# EAGLE board CPC_BACKPLANE (EAGLE 6.4)
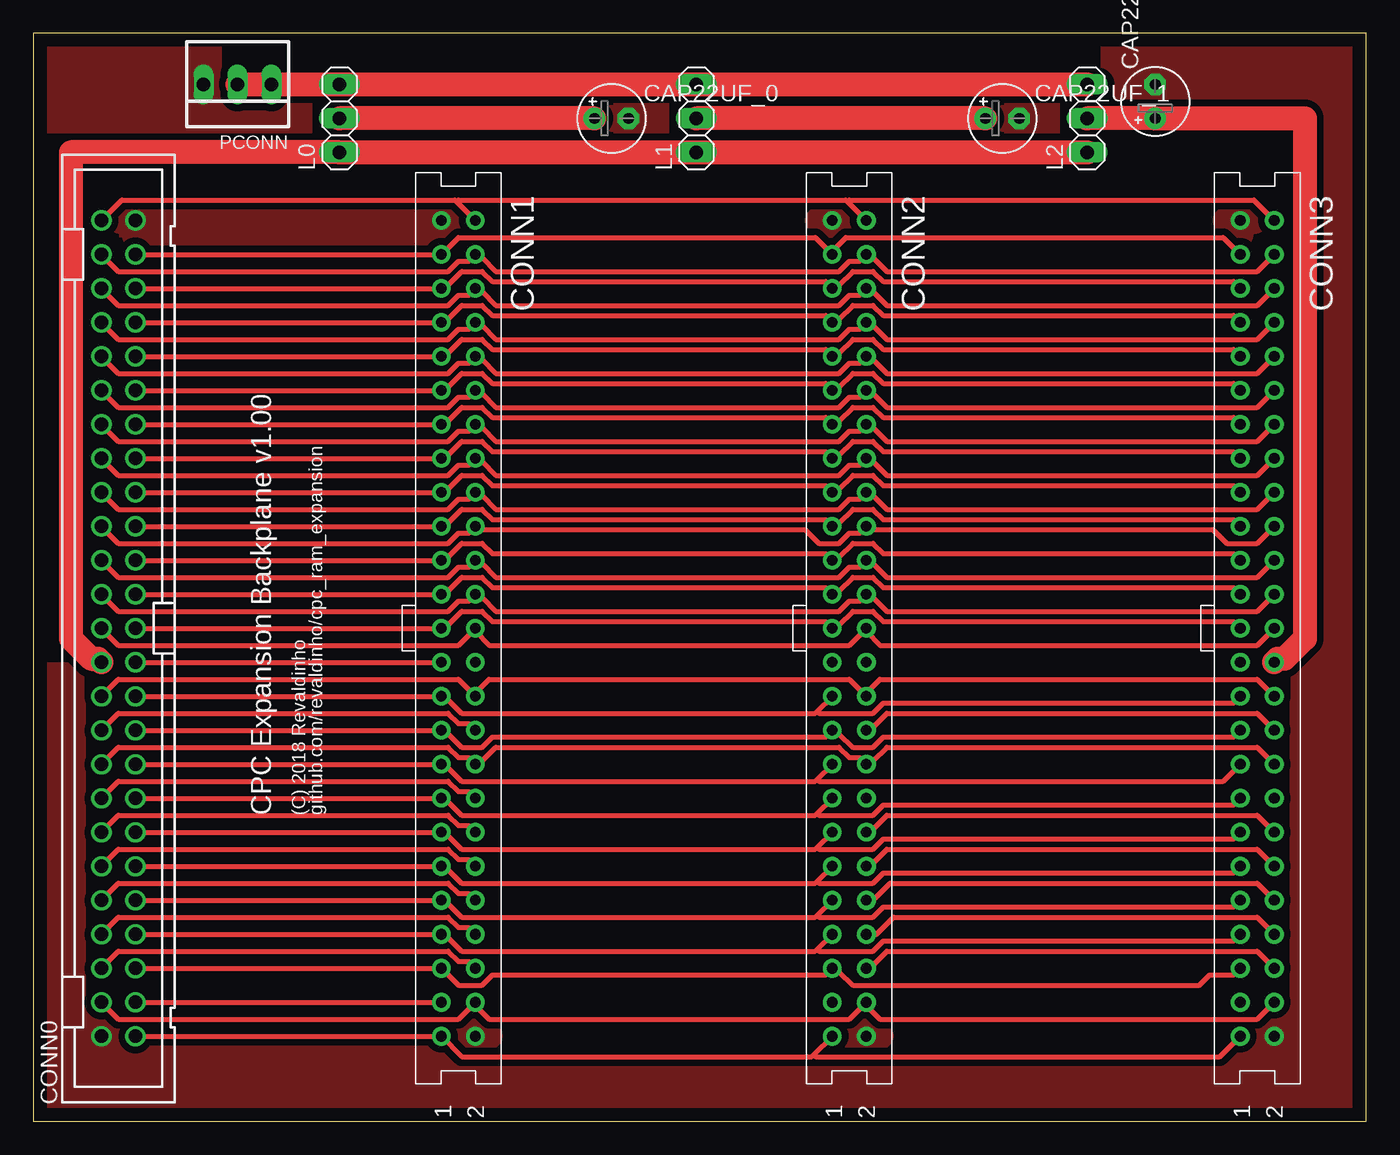
[diagram p0: board, top side]
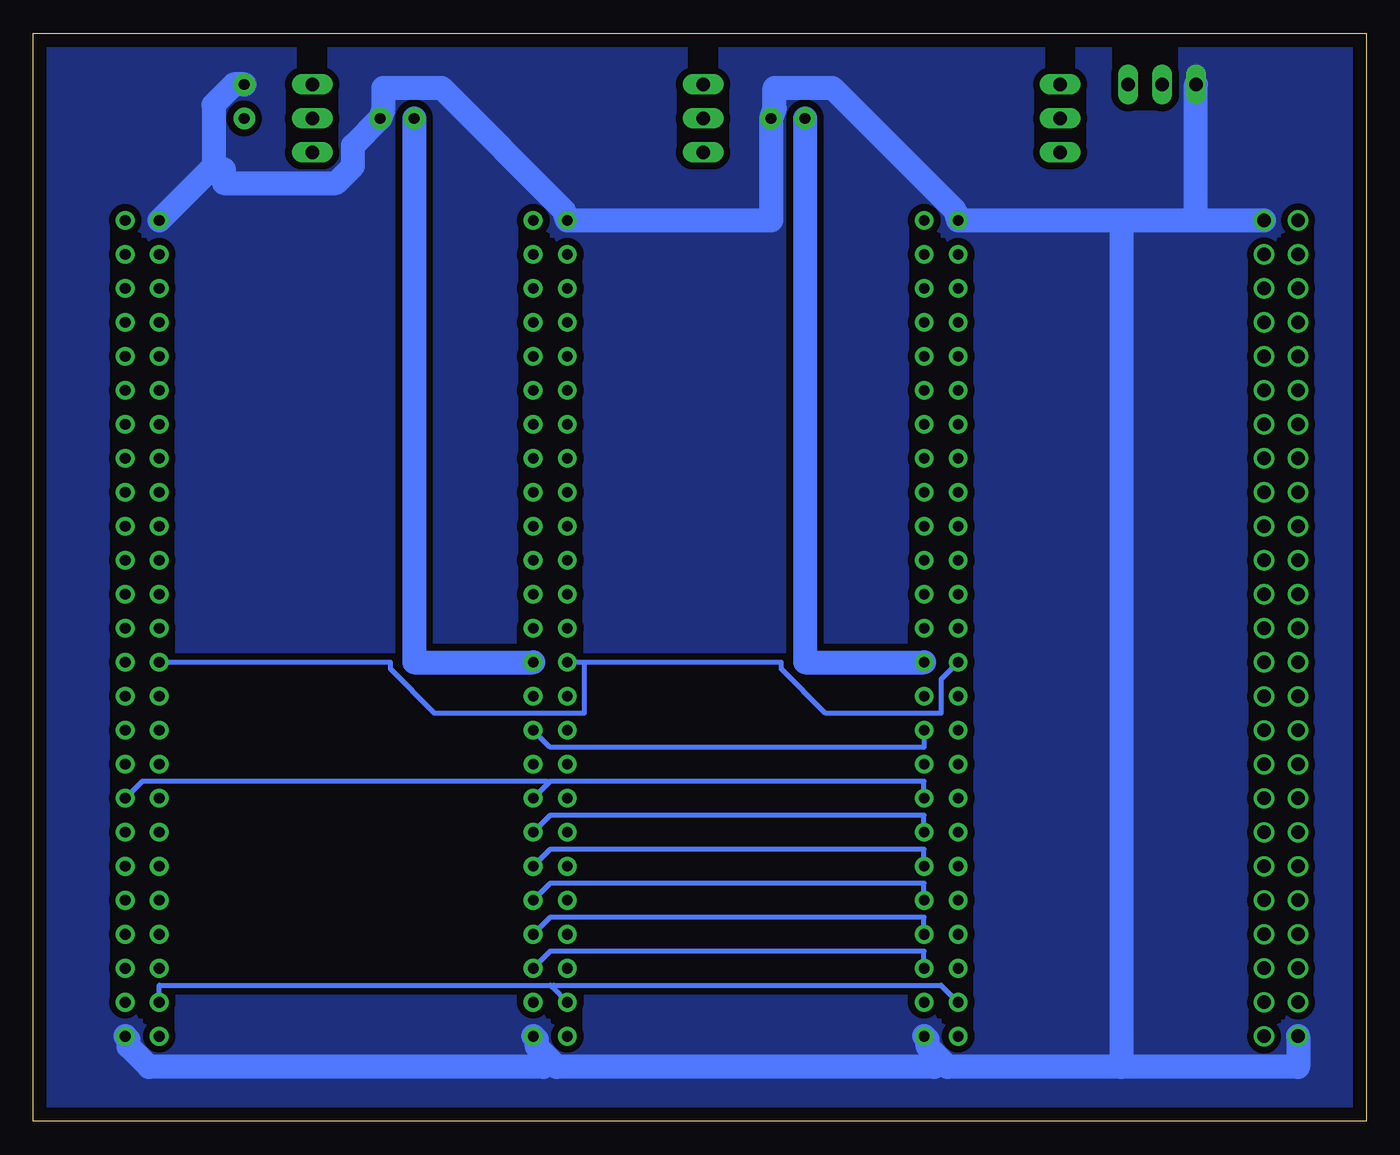
[diagram p1: board, bottom side, seen from below]

Size 99.57 x 81.28 mm. Coordinates in mm from the lower left corner, seen from the top.
Outline: 0,0 99.57,0 99.57,81.28 0,81.28 0,0
Copper layers (1*16): Top 0.035mm / dielectric 1.5mm / Bottom 0.035mm
Design rules "default": minimum track width 10mil, minimum drill 24mil, track to track 8mil, track to pad 8mil, pad to pad 8mil, via to via 8mil, smd to smd 8mil, copper to edge 40mil, drill to drill 8mil, minimum pad ring 10mil, minimum via ring 8mil, stop-mask expansion 4mil, vias tented up to drill 0mil, thermal gap 10mil
Net classes: 0 signal: width 0.381 mm, clearance 0.254 mm; 1 supply: width 1.778 mm, clearance 0.508 mm

## Footprints (pad centres in the part's own frame; a part is rotated, then mirrored left to right if it is on the bottom)
E2,5-5 = drill 0.813 pad 1.6: + -1.27,0 | drill 0.813 pad 1.6 octagon: - 1.27,0
PAK100/2500-50 = drill 1 pad 1.422: 1 -30.48,-1.27; 2 -30.48,1.27; 3 -27.94,-1.27; 4 -27.94,1.27; 5 -25.4,-1.27; 6 -25.4,1.27; 7 -22.86,-1.27; 8 -22.86,1.27; 9 -20.32,-1.27; 10 -20.32,1.27; 11 -17.78,-1.27; 12 -17.78,1.27; 13 -15.24,-1.27; 14 -15.24,1.27; 15 -12.7,-1.27; 16 -12.7,1.27; 17 -10.16,-1.27; 18 -10.16,1.27; 19 -7.62,-1.27; 20 -7.62,1.27; 21 -5.08,-1.27; 22 -5.08,1.27; 23 -2.54,-1.27; 24 -2.54,1.27; 25 0,-1.27; 26 0,1.27; 27 2.54,-1.27; 28 2.54,1.27; 29 5.08,-1.27; 30 5.08,1.27; 31 7.62,-1.27; 32 7.62,1.27; 33 10.16,-1.27; 34 10.16,1.27; 35 12.7,-1.27; 36 12.7,1.27; 37 15.24,-1.27; 38 15.24,1.27; 39 17.78,-1.27; 40 17.78,1.27; 41 20.32,-1.27; 42 20.32,1.27; 43 22.86,-1.27; 44 22.86,1.27; 45 25.4,-1.27; 46 25.4,1.27; 47 27.94,-1.27; 48 27.94,1.27; 49 30.48,-1.27; 50 30.48,1.27
S50V = drill 0.8 pad 1.4: 1 30.48,-1.27; 2 30.48,1.27; 3 27.94,-1.27; 4 27.94,1.27; 5 25.4,-1.27; 6 25.4,1.27; 7 22.86,-1.27; 8 22.86,1.27; 9 20.32,-1.27; 10 20.32,1.27; 11 17.78,-1.27; 12 17.78,1.27; 13 15.24,-1.27; 14 15.24,1.27; 15 12.7,-1.27; 16 12.7,1.27; 17 10.16,-1.27; 18 10.16,1.27; 19 7.62,-1.27; 20 7.62,1.27; 21 5.08,-1.27; 22 5.08,1.27; 23 2.54,-1.27; 24 2.54,1.27; 25 0,-1.27; 26 0,1.27; 27 -2.54,-1.27; 28 -2.54,1.27; 29 -5.08,-1.27; 30 -5.08,1.27; 31 -7.62,-1.27; 32 -7.62,1.27; 33 -10.16,-1.27; 34 -10.16,1.27; 35 -12.7,-1.27; 36 -12.7,1.27; 37 -15.24,-1.27; 38 -15.24,1.27; 39 -17.78,-1.27; 40 -17.78,1.27; 41 -20.32,-1.27; 42 -20.32,1.27; 43 -22.86,-1.27; 44 -22.86,1.27; 45 -25.4,-1.27; 46 -25.4,1.27; 47 -27.94,-1.27; 48 -27.94,1.27; 49 -30.48,-1.27; 50 -30.48,1.27
1X03 = drill 1.016 long: 1 -2.54,0; 2 0,0; 3 2.54,0
22-23-2031 = drill 1 long: 1 -2.54,0; 2 0,0; 3 2.54,0

## Placement (x,y rotation side)
CAP22UF_0  [E2,5-5]  43.18,74.93 0 top
CAP22UF_1  [E2,5-5]  72.39,74.93 0 top
CAP22UF_2  [E2,5-5]  83.82,76.2 90 top
CONN0  [PAK100/2500-50]  6.35,36.83 90 top
CONN1  [S50V]  31.75,36.83 270 top
CONN2  [S50V]  60.96,36.83 270 top
CONN3  [S50V]  91.44,36.83 270 top
L0  [1X03]  22.86,74.93 90 top
L1  [1X03]  49.53,74.93 90 top
L2  [1X03]  78.74,74.93 90 top
PCONN  [22-23-2031]  15.24,77.47 180 top

## Library data of the parts
CAP22UF_0 CAP22UF_1 CAP22UF_2 = resistor
CONN0 = con-3m
CONN1-CONN3 = con-3m-skt-header
L0 L1 L2 = pinhead
PCONN = con-molex

## Nets
A0: CONN0.33 CONN1.33 CONN2.33 CONN3.33
A1: CONN0.34 CONN1.34 CONN2.34 CONN3.34
A2: CONN0.35 CONN1.35 CONN2.35 CONN3.35
A3: CONN0.36 CONN1.36 CONN2.36 CONN3.36
A4: CONN0.37 CONN1.37 CONN2.37 CONN3.37
A5: CONN0.38 CONN1.38 CONN2.38 CONN3.38
A6: CONN0.39 CONN1.39 CONN2.39 CONN3.39
A7: CONN0.40 CONN1.40 CONN2.40 CONN3.40
A8: CONN0.41 CONN1.41 CONN2.41 CONN3.41
A9: CONN0.42 CONN1.42 CONN2.42 CONN3.42
A10: CONN0.43 CONN1.43 CONN2.43 CONN3.43
A11: CONN0.44 CONN1.44 CONN2.44 CONN3.44
A12: CONN0.45 CONN1.45 CONN2.45 CONN3.45
A13: CONN0.46 CONN1.46 CONN2.46 CONN3.46
A14: CONN0.47 CONN1.47 CONN2.47 CONN3.47
A15: CONN0.48 CONN1.48 CONN2.48 CONN3.48
BUSACK_B: CONN0.13 CONN1.13 CONN2.13 CONN3.13
BUSRESET_B: CONN0.11 CONN1.11 CONN2.11 CONN3.11
BUSRQ_B: CONN0.14 CONN1.14 CONN2.14 CONN3.14
CLK: CONN0.1 CONN1.1 CONN2.1 CONN3.1
CURSOR: CONN0.5 CONN1.5 CONN2.5 CONN3.5
D0: CONN0.25 CONN1.25 CONN2.25 CONN3.25
D1: CONN0.26 CONN1.26 CONN2.26 CONN3.26
D2: CONN0.27 CONN1.27 CONN2.27 CONN3.27
D3: CONN0.28 CONN1.28 CONN2.28 CONN3.28
D4: CONN0.29 CONN1.29 CONN2.29 CONN3.29
D5: CONN0.30 CONN1.30 CONN2.30 CONN3.30
D6: CONN0.31 CONN1.31 CONN2.31 CONN3.31
D7: CONN0.32 CONN1.32 CONN2.32 CONN3.32
EXP_B: CONN0.3 CONN1.3 CONN2.3 CONN3.3
HALT_B: CONN0.17 CONN1.17 CONN2.17 CONN3.17
INT_B: CONN0.16 CONN1.16 CONN2.16 CONN3.16
IOREQ_B: CONN0.20 CONN1.20 CONN2.20 CONN3.20
LPEN: CONN0.4 CONN1.4 CONN2.4 CONN3.4
M1_B: CONN0.22 CONN1.22 CONN2.22 CONN3.22
MREQ_B: CONN0.23 CONN1.23 CONN2.23 CONN3.23
NMI_B: CONN0.15 CONN1.15 CONN2.15 CONN3.15
RAMDIS: CONN0.6 CONN1.6 CONN2.6 CONN3.6
RAMRD_B: CONN0.7 CONN1.7 CONN2.7 CONN3.7
RD_B: CONN0.19 CONN1.19 CONN2.19 CONN3.19
READY: CONN0.12 CONN1.12 CONN2.12 CONN3.12
RESET_B: CONN0.10 CONN1.10 CONN2.10 CONN3.10
RFSH_B: CONN0.21 CONN1.21 CONN2.21 CONN3.21
ROMDIS: CONN0.8 CONN1.8 CONN2.8 CONN3.8
ROMEN_B: CONN0.9 CONN1.9 CONN2.9 CONN3.9
SOUND: CONN0.50 CONN1.50 CONN2.50 CONN3.50
VDD1 [supply]: CAP22UF_0.+ CONN1.24 L0.2
VDD2 [supply]: CAP22UF_1.+ CONN2.24 L1.2
VDD3 [supply]: CAP22UF_2.+ CONN3.24 L2.2
VDD_CPC [supply]: CONN0.24 L0.1 L1.1 L2.1
VDD_EXT [supply]: L0.3 L1.3 L2.3 PCONN.1 PCONN.2
VSS [supply]: CAP22UF_0.- CAP22UF_1.- CAP22UF_2.- CONN0.2 CONN0.49 CONN1.2 CONN1.49 CONN2.2 CONN2.49 CONN3.2 CONN3.49 PCONN.3
WR_B: CONN0.18 CONN1.18 CONN2.18 CONN3.18

## Tracks (layer width: path | path; a pad name or v marks a point on that pad's centre or on a via)
A0
  Top 0.381: CONN0.33 CONN1.33 30.73,46.99 32,48.26 33.53,48.26 34.29,47.5 59.18,47.5 CONN2.33 59.69,47.24 60.2,47.24 61.21,48.26 62.74,48.26 63.5,47.5 89.66,47.5 CONN3.33
A1
  Top 0.381: CONN0.34 6.35,45.72 30.99,45.72 31.75,46.48 32.51,46.48 CONN1.34 33.02,46.74 33.53,46.74 34.54,45.72 60.2,45.72 60.96,46.48 61.72,46.48 CONN2.34 62.23,46.74 62.74,46.74 63.75,45.72 91.44,45.72 CONN3.34
A2
  Top 0.381: CONN0.35 CONN1.35 30.73,49.53 32,50.8 33.53,50.8 34.29,50.04 59.18,50.04 CONN2.35 59.69,49.78 60.2,49.78 61.21,50.8 62.74,50.8 63.5,50.04 89.66,50.04 CONN3.35
A3
  Top 0.381: CONN0.36 6.35,48.26 30.99,48.26 31.75,49.02 32.51,49.02 CONN1.36 33.02,49.28 33.53,49.28 34.54,48.26 60.2,48.26 60.96,49.02 61.72,49.02 CONN2.36 62.23,49.28 62.74,49.28 63.75,48.26 91.44,48.26 CONN3.36
A4
  Top 0.381: CONN0.37 CONN1.37 30.73,52.07 32,53.34 33.53,53.34 34.29,52.58 59.18,52.58 CONN2.37 59.69,52.32 60.2,52.32 61.21,53.34 62.74,53.34 63.5,52.58 89.66,52.58 CONN3.37
A5
  Top 0.381: CONN0.38 6.35,50.8 30.99,50.8 31.75,51.56 32.51,51.56 CONN1.38 33.02,51.82 33.53,51.82 34.54,50.8 60.2,50.8 60.96,51.56 61.72,51.56 CONN2.38 62.23,51.82 62.74,51.82 63.75,50.8 91.44,50.8 CONN3.38
A6
  Top 0.381: CONN0.39 CONN1.39 30.73,54.61 32,55.88 33.53,55.88 34.29,55.12 59.18,55.12 CONN2.39 59.69,54.86 60.2,54.86 61.21,55.88 62.74,55.88 63.5,55.12 89.66,55.12 CONN3.39
A7
  Top 0.381: CONN0.40 6.35,53.34 30.99,53.34 31.75,54.1 32.51,54.1 CONN1.40 33.02,54.36 33.53,54.36 34.54,53.34 60.2,53.34 60.96,54.1 61.72,54.1 CONN2.40 62.23,54.36 62.74,54.36 63.75,53.34 91.44,53.34 CONN3.40
A8
  Top 0.381: CONN0.41 CONN1.41 30.73,57.15 32,58.42 33.53,58.42 34.29,57.66 59.18,57.66 CONN2.41 59.69,57.4 60.2,57.4 61.21,58.42 62.74,58.42 63.5,57.66 89.66,57.66 CONN3.41
A9
  Top 0.381: CONN0.42 6.35,55.88 30.99,55.88 31.75,56.64 32.51,56.64 CONN1.42 33.02,56.9 33.53,56.9 34.54,55.88 60.2,55.88 60.96,56.64 61.72,56.64 CONN2.42 62.23,56.9 62.74,56.9 63.75,55.88 91.44,55.88 CONN3.42
A10
  Top 0.381: CONN0.43 CONN1.43 30.73,59.69 32,60.96 33.53,60.96 34.29,60.2 59.18,60.2 CONN2.43 59.69,59.94 60.2,59.94 61.21,60.96 62.74,60.96 63.5,60.2 89.66,60.2 CONN3.43
A11
  Top 0.381: CONN0.44 6.35,58.42 30.99,58.42 31.75,59.18 32.51,59.18 CONN1.44 33.02,59.44 33.53,59.44 34.54,58.42 60.2,58.42 60.96,59.18 61.72,59.18 CONN2.44 62.23,59.44 62.74,59.44 63.75,58.42 91.44,58.42 CONN3.44
A12
  Top 0.381: CONN0.45 CONN1.45 30.73,62.23 32,63.5 33.53,63.5 34.29,62.74 59.18,62.74 CONN2.45 59.69,62.48 60.2,62.48 61.21,63.5 62.74,63.5 63.5,62.74 89.66,62.74 CONN3.45
A13
  Top 0.381: CONN0.46 6.35,60.96 30.99,60.96 31.75,61.72 32.51,61.72 CONN1.46 33.02,61.98 33.53,61.98 34.54,60.96 60.2,60.96 60.96,61.72 61.72,61.72 CONN2.46 62.23,61.98 62.74,61.98 63.75,60.96 91.44,60.96 CONN3.46
A14
  Top 0.381: CONN0.47 CONN1.47 31.75,66.04 58.42,66.04 CONN2.47 59.69,65.02 60.71,66.04 88.9,66.04 CONN3.47
A15
  Top 0.381: CONN0.48 6.35,63.5 30.99,63.5 31.75,64.26 32.51,64.26 CONN1.48 33.02,64.52 33.53,64.52 34.54,63.5 60.2,63.5 60.96,64.26 61.72,64.26 CONN2.48 62.23,64.52 62.74,64.52 63.75,63.5 91.44,63.5 CONN3.48
BUSACK_B
  Top 0.381: CONN0.13 CONN1.13 30.73,21.59 32,20.32 58.42,20.32 58.55,20.45 | 58.55,20.45 CONN2.13 | CONN3.13 89.66,21.08 63.5,21.08 62.74,20.32 58.67,20.32 58.55,20.45
BUSRESET_B
  Top 0.381: CONN0.11 CONN1.11 30.73,19.05 32,17.78 58.42,17.78 58.55,17.91 | 58.55,17.91 CONN2.11 | CONN3.11 89.66,18.54 63.5,18.54 62.74,17.78 58.67,17.78 58.55,17.91
BUSRQ_B
  Top 0.381: CONN1.14 32.51,22.1 31.75,22.1 30.99,22.86 6.35,22.86 CONN0.14 | CONN3.14 91.44,22.86 63.75,22.86 62.48,21.59 CONN2.14
  Bottom 0.381: CONN2.14 60.96,22.86 33.02,22.86 CONN1.14
CLK
  Top 0.381: CONN0.1 CONN1.1 32,4.83 58.17,4.83 58.29,4.95 | 58.29,4.95 CONN2.1 | CONN3.1 88.65,4.83 58.42,4.83 58.29,4.95
CURSOR
  Top 0.381: CONN0.5 CONN1.5 31.75,10.16 33.53,10.16 34.29,10.92 59.18,10.92 CONN2.5 59.69,11.18 60.2,11.18 61.21,10.16 87.12,10.16 87.88,10.92 89.66,10.92 CONN3.5
D0
  Top 0.381: CONN0.25 CONN1.25 30.73,36.83 32,38.1 33.53,38.1 34.29,37.34 59.18,37.34 CONN2.25 59.69,37.08 60.2,37.08 61.21,38.1 62.74,38.1 63.5,37.34 89.66,37.34 CONN3.25
D1
  Top 0.381: CONN0.26 6.35,35.56 31.75,35.56 CONN1.26 33.02,36.58 34.04,35.56 60.96,35.56 CONN2.26 62.23,36.58 63.25,35.56 91.44,35.56 CONN3.26
D2
  Top 0.381: CONN0.27 CONN1.27 30.73,39.37 32,40.64 33.53,40.64 34.29,39.88 59.18,39.88 CONN2.27 59.69,39.62 60.2,39.62 61.21,40.64 62.74,40.64 63.5,39.88 89.66,39.88 CONN3.27
D3
  Top 0.381: CONN0.28 6.35,38.1 30.99,38.1 31.75,38.86 32.51,38.86 CONN1.28 33.02,39.12 33.53,39.12 34.54,38.1 60.2,38.1 60.96,38.86 61.72,38.86 CONN2.28 62.23,39.12 62.74,39.12 63.75,38.1 91.44,38.1 CONN3.28
D4
  Top 0.381: CONN0.29 CONN1.29 30.73,41.91 32,43.18 33.53,43.18 34.29,42.42 59.18,42.42 CONN2.29 59.69,42.16 60.2,42.16 61.21,43.18 62.74,43.18 63.5,42.42 89.66,42.42 CONN3.29
D5
  Top 0.381: CONN0.30 6.35,40.64 30.99,40.64 31.75,41.4 32.51,41.4 CONN1.30 33.02,41.66 33.53,41.66 34.54,40.64 60.2,40.64 60.96,41.4 61.72,41.4 CONN2.30 62.23,41.66 62.74,41.66 63.75,40.64 91.44,40.64 CONN3.30
D6
  Top 0.381: CONN0.31 CONN1.31 30.73,44.45 32,45.72 33.53,45.72 34.29,44.96 59.18,44.96 CONN2.31 59.69,44.7 60.2,44.7 61.21,45.72 62.74,45.72 63.5,44.96 89.66,44.96 CONN3.31
D7
  Top 0.381: CONN0.32 6.35,43.18 30.99,43.18 31.75,43.94 32.51,43.94 CONN1.32 33.02,44.2 57.66,44.2 58.67,43.18 60.2,43.18 60.96,43.94 61.72,43.94 CONN2.32 62.23,44.2 88.14,44.2 89.15,43.18 91.44,43.18 CONN3.32
EXP_B
  Top 0.381: CONN0.3 CONN1.3
  Bottom 0.381: 60.83,10.03 60.96,10.16 90.17,10.16 CONN3.3 | 60.83,10.03 CONN2.3 | CONN1.3 31.75,10.16 60.71,10.16 60.83,10.03
HALT_B
  Top 0.381: CONN0.17 CONN1.17 30.73,26.67 32,25.4 58.42,25.4 58.55,25.53 | 58.55,25.53 CONN2.17 | CONN3.17 88.9,25.4 58.67,25.4 58.55,25.53
INT_B
  Top 0.381: CONN1.16 32.51,24.64 31.75,24.64 30.99,25.4 6.35,25.4 CONN0.16
  Bottom 0.381: 61.09,25.27 60.96,25.4 33.02,25.4 CONN1.16 | 61.09,25.27 CONN2.16 | CONN3.16 91.44,25.4 61.21,25.4 61.09,25.27
IOREQ_B
  Top 0.381: CONN1.20 32.51,29.72 31.75,29.72 30.99,30.48 6.35,30.48 CONN0.20 | CONN3.20 91.44,30.48 63.75,30.48 62.48,29.21 CONN2.20
  Bottom 0.381: CONN2.20 60.96,27.94 33.02,27.94 CONN1.20
LPEN
  Top 0.381: CONN0.4 6.35,7.62 31.75,7.62 CONN1.4 33.02,8.64 34.04,7.62 60.96,7.62 CONN2.4 62.23,8.64 63.25,7.62 91.44,7.62 CONN3.4
M1_B
  Top 0.381: CONN0.22 6.35,33.02 31.75,33.02 CONN1.22 33.02,32 34.04,33.02 60.96,33.02 CONN2.22 62.23,32 63.25,33.02 91.44,33.02 CONN3.22
MREQ_B
  Top 0.381: CONN0.23 CONN1.23
  Bottom 0.381: 58.42,34.29 43.69,34.29 43.69,33.78 40.39,30.48 31.75,30.48 31.75,33.02 CONN1.23 | 58.42,34.29 CONN2.23 | CONN3.23 72.9,34.29 72.9,33.78 69.6,30.48 58.42,30.48 58.42,34.29
NMI_B
  Top 0.381: CONN0.15 CONN1.15 30.73,24.13 32,22.86 58.42,22.86 58.55,22.99 | 58.55,22.99 CONN2.15 | CONN3.15 89.66,23.62 63.5,23.62 62.74,22.86 58.67,22.86 58.55,22.99
RAMDIS
  Top 0.381: CONN1.6 32.51,11.94 31.75,11.94 30.99,12.7 6.35,12.7 CONN0.6 | CONN3.6 91.44,12.7 63.75,12.7 62.48,11.43 CONN2.6
  Bottom 0.381: CONN2.6 60.96,12.7 33.02,12.7 CONN1.6
RAMRD_B
  Top 0.381: CONN0.7 CONN1.7 30.73,13.97 32,12.7 58.42,12.7 58.55,12.83 | 58.55,12.83 CONN2.7 | CONN3.7 89.66,13.46 63.5,13.46 62.74,12.7 58.67,12.7 58.55,12.83
RD_B
  Top 0.381: CONN0.19 CONN1.19 30.73,29.21 32,27.94 33.53,27.94 34.29,28.7 59.18,28.7 CONN2.19 59.69,28.96 60.2,28.96 61.21,27.94 62.74,27.94 63.5,28.7 89.66,28.7 CONN3.19
READY
  Top 0.381: CONN1.12 32.51,19.56 31.75,19.56 30.99,20.32 6.35,20.32 CONN0.12 | CONN3.12 91.44,20.32 63.75,20.32 62.48,19.05 CONN2.12
  Bottom 0.381: CONN2.12 60.96,20.32 33.02,20.32 CONN1.12
RESET_B
  Top 0.381: CONN1.10 32.51,17.02 31.75,17.02 30.99,17.78 6.35,17.78 CONN0.10 | CONN3.10 91.44,17.78 64.01,17.78 62.74,16.51 CONN2.10
  Bottom 0.381: CONN2.10 60.96,17.78 33.02,17.78 CONN1.10
RFSH_B
  Top 0.381: CONN0.21 CONN1.21 30.73,31.75 32,30.48 58.42,30.48 58.55,30.61 | 58.55,30.61 CONN2.21 | CONN3.21 89.66,31.24 63.5,31.24 62.74,30.48 58.67,30.48 58.55,30.61
ROMDIS
  Top 0.381: CONN1.8 32.51,14.48 31.75,14.48 30.99,15.24 6.35,15.24 CONN0.8 | CONN3.8 91.44,15.24 64.26,15.24 62.99,13.97 CONN2.8
  Bottom 0.381: CONN2.8 60.96,15.24 33.02,15.24 CONN1.8
ROMEN_B
  Top 0.381: CONN0.9 CONN1.9 30.73,16.51 32,15.24 58.42,15.24 58.55,15.37 | 58.55,15.37 CONN2.9 | CONN3.9 89.66,16 63.5,16 62.74,15.24 58.67,15.24 58.55,15.37
SOUND
  Top 0.381: 31.62,68.71 31.5,68.83 6.6,68.83 CONN0.50 | 31.62,68.71 CONN1.50 | 60.83,68.71 60.71,68.83 31.75,68.83 31.62,68.71 | 60.83,68.71 CONN2.50 | CONN3.50 91.19,68.83 60.96,68.83 60.83,68.71
VDD1
  Top 1.778: CAP22UF_0.+ L0.2
  Bottom 1.778: CONN1.24 41.91,34.29 CAP22UF_0.+
VDD2
  Top 1.778: CAP22UF_1.+ L1.2
  Bottom 1.778: CONN2.24 71.12,34.29 CAP22UF_1.+
VDD3
  Top 1.778: CONN3.24 92.96,34.54 93.47,34.54 95,36.07 95,74.93 CAP22UF_2.+ L2.2
VDD_CPC
  Top 1.778: L2.1 L1.1 L0.1 2.79,72.39 2.79,36.07 4.32,34.54 4.83,34.54 CONN0.24
VDD_EXT
  Top 1.778: PCONN.2 PCONN.1 L0.3 L1.3 L2.3
VSS
  Bottom 1.778: CONN1.2 32.77,6.1 32.77,5.59 31.75,4.57 | 31.75,4.57 31.24,4.06 18.29,4.06 | 18.29,4.06 5.08,4.06 CONN0.2 | CONN2.2 61.98,6.1 61.98,5.59 60.96,4.57 | 60.96,4.57 60.45,4.06 32.26,4.06 31.75,4.57 | CONN3.2 92.46,6.1 92.46,5.59 90.93,4.06 61.47,4.06 60.96,4.57 | CONN0.49 12.7,67.31 | 12.7,67.31 18.29,67.31 | 18.29,67.31 CONN1.49 30.73,68.07 39.88,77.22 44.2,77.22 44.2,75.69 CAP22UF_0.- 44.45,67.31 CONN2.49 59.94,68.07 69.09,77.22 73.41,77.22 73.41,75.69 CAP22UF_1.- 75.69,72.9 75.69,71.37 76.96,70.1 85.34,70.1 85.34,71.12 86.11,71.37 | 12.7,67.31 PCONN.3 | 86.11,71.37 CONN3.49 | 86.11,71.37 86.11,75.95 84.58,77.47 CAP22UF_2.- | 18.29,67.31 18.29,4.06
  pour Top: 0,0 0,81.28 99.57,81.28 100.33,81.28 100.33,0
  pour Bottom: 0,0 0,81.28 99.57,81.28 100.33,81.28 100.33,0
WR_B
  Top 0.381: CONN0.18 6.35,27.94 30.99,27.94 31.75,27.18 32.51,27.18 CONN1.18 33.02,26.92 33.53,26.92 34.54,27.94 60.2,27.94 60.96,27.18 61.72,27.18 CONN2.18 62.23,26.92 62.74,26.92 63.75,27.94 91.44,27.94 CONN3.18

## Text on the board
tPlace: CPC Expansion Backplane v1.00 | (C) 2018 Revaldinho | github.com/revaldinho/cpc_ram_expansion